# Altium PCB my-cnc.PcbDoc
Units mm, origin at the board's own origin, x right, y up, seen from the top; angles counter-clockwise.
Board outline 114.12 x 103.48 mm, 2 copper layers (Top Layer, Bottom Layer); 58 components, 59 nets, 304 pads, 76 vias.
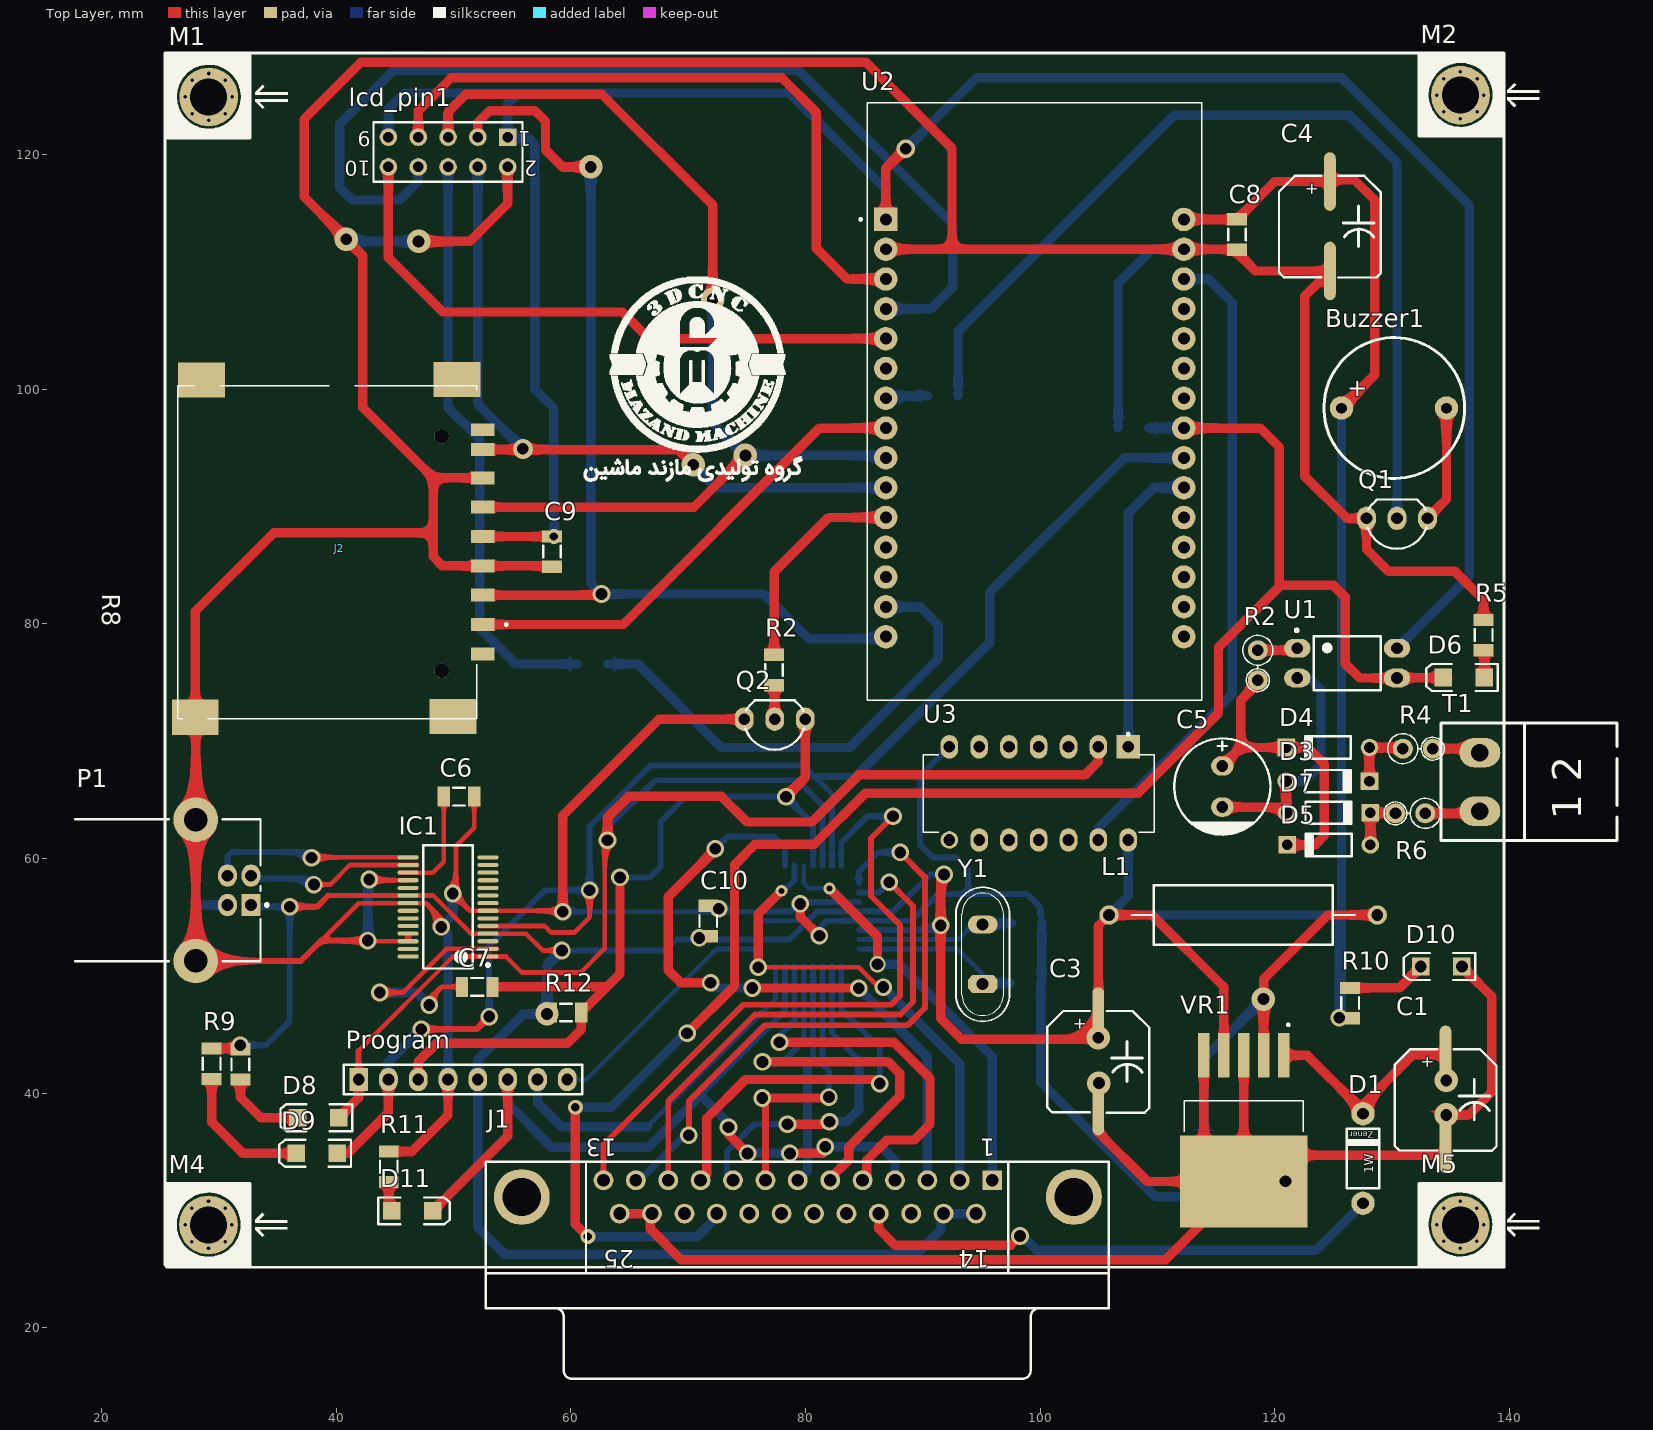
[diagram p0: Top Layer view]
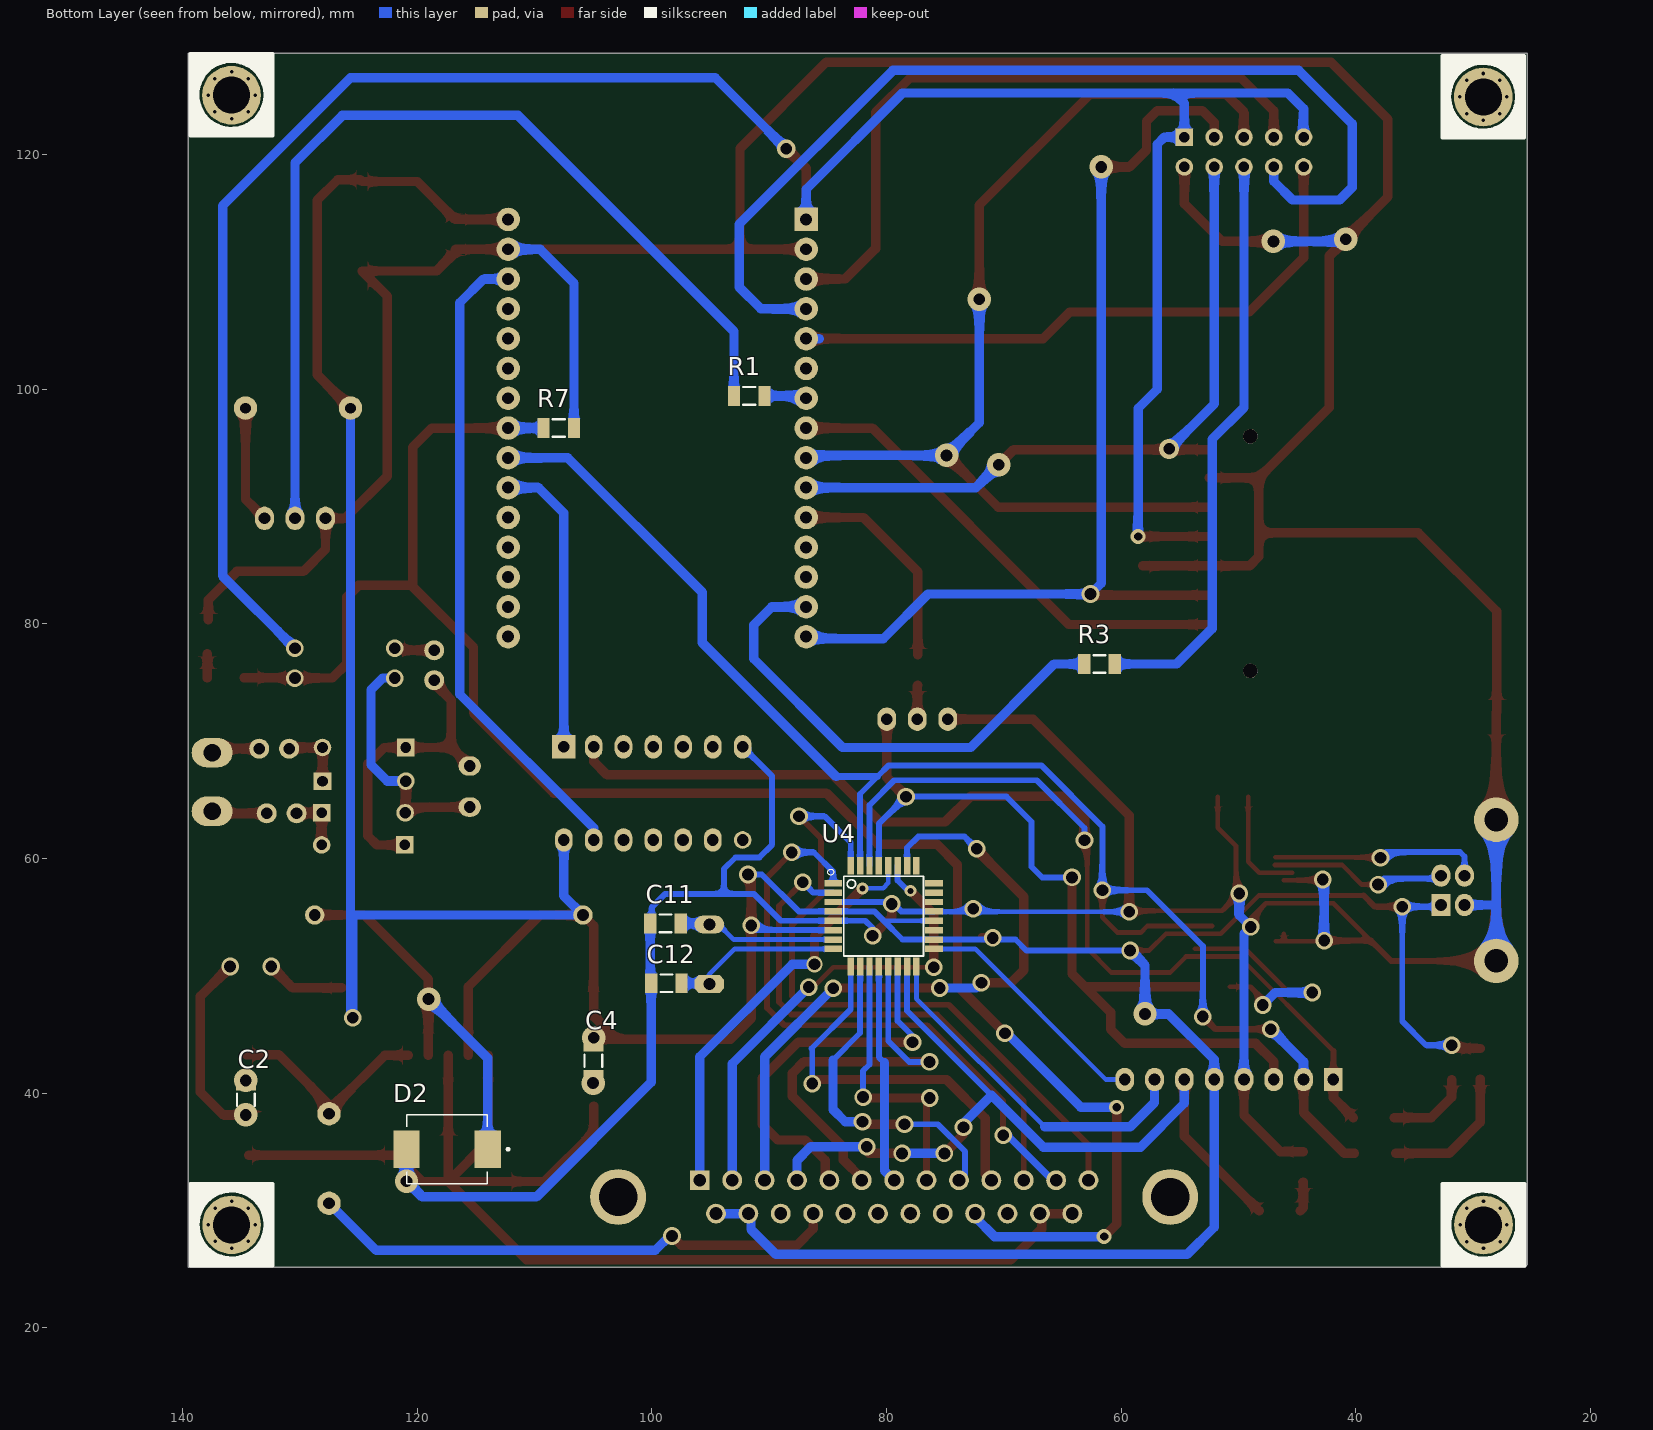
[diagram p1: Bottom Layer view, seen from below]
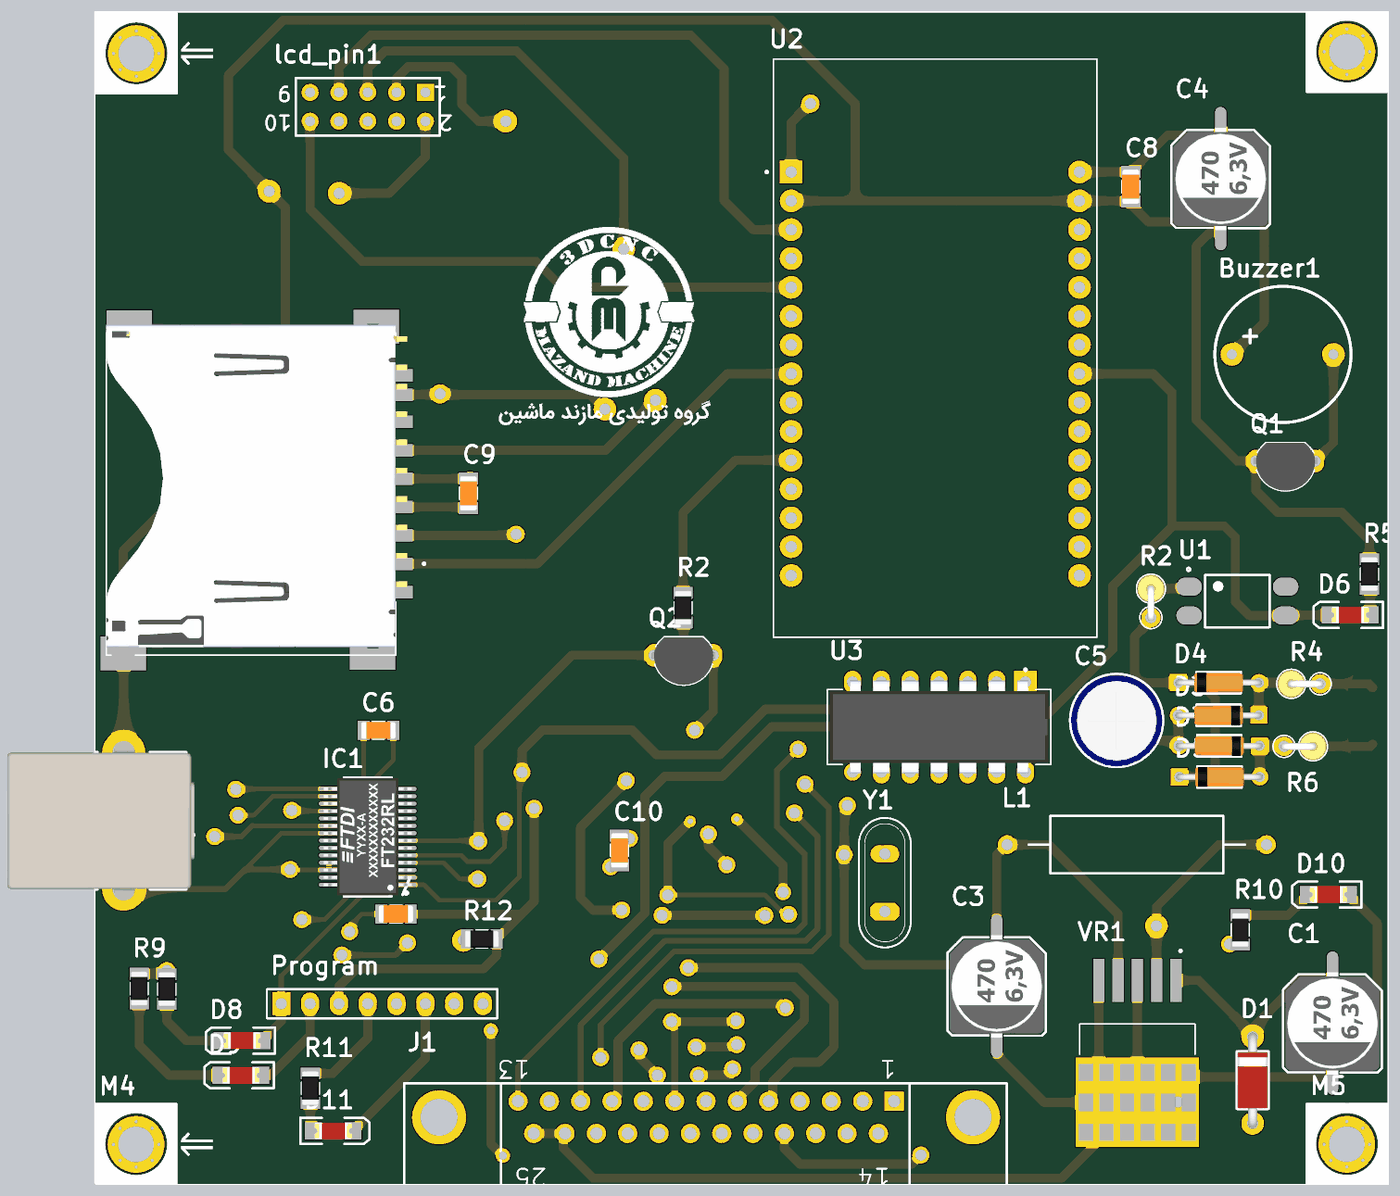
[diagram p2: 3D render of the assembled board from above, using the file's embedded part models]
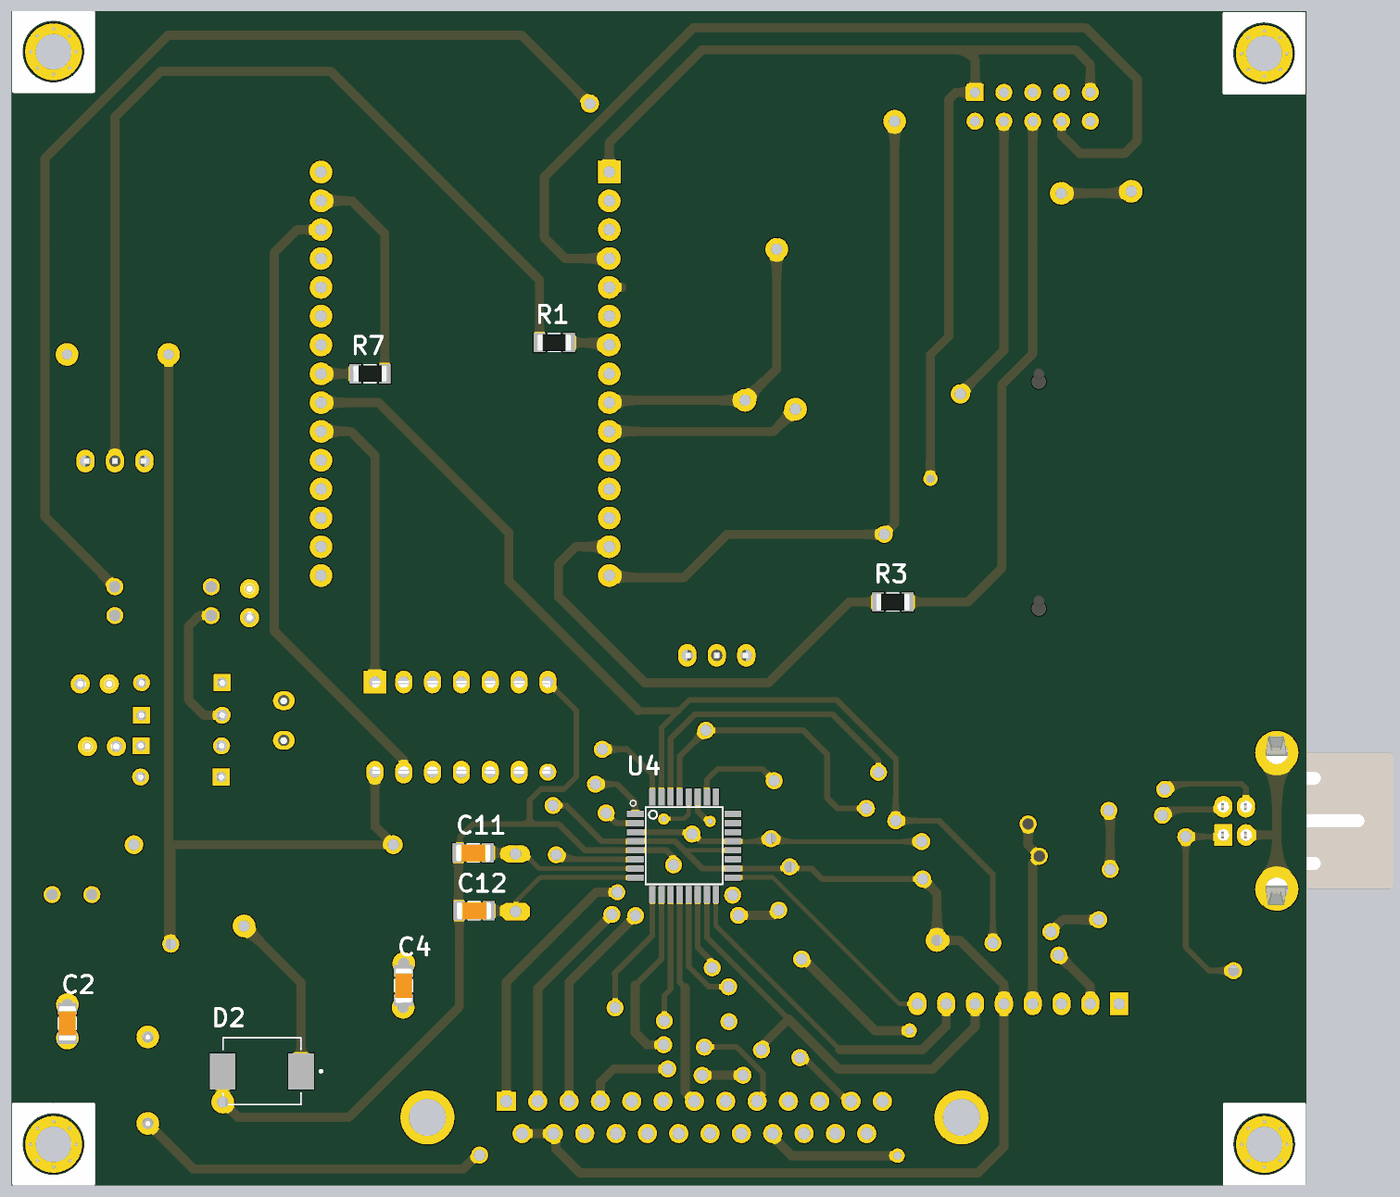
[diagram p3: 3D render of the assembled board from below, using the file's embedded part models]

## Layer stack, top to bottom
Top Solder: solder mask 0.0102, Solder Resist, Dk 3.5
Top Layer: signal copper 0.0356
Dielectric 1: dielectric 0.32, FR-4, Dk 4.8
Bottom Layer: signal copper 0.0356
Bottom Solder: solder mask 0.0102, Solder Resist, Dk 3.5

## Board outline
25.4,25.375 25.603,25.171 139.522,25.171 139.522,128.651 25.4,128.651

## Design rules (kind name [scope] priority, off if disabled: settings)
Clearance [All] p1: gap=0.2 ignorepadtopadclearanceinfootprint=FALSE
PolygonConnect [All] p1: connectstyle=Relief reliefconductorwidth=0.254 reliefentries=4 polygonreliefangle="90 Angle" airgapwidth=0.254
RoutingVias [All] p1: holewidth=0.711 width=1.27 viastyle="Through Hole" minholewidth=0.711 minwidth=1.27 maxholewidth=0.711 maxwidth=1.27
SolderMaskExpansion [All] p1: expansion=0.102
Width [All] p1: maxlimit=0.8 minlimit=0.4 preferedwidth=0.5
30 further rules are at their usual default settings.

## Components (designator, comment, footprint, x,y, rotation, side; value= is the part's Value field where it differs from the comment)
Buzzer1 "Buzzer" BUZZER 130.175,98.4 r0 top
C1 "1uF" "CAP SMD 470uF" 134.544,39.472 r90 top
C2 "100nF" SMD_CAP_1206 134.595,38.151 r90 bottom
C3 "1uF" "CAP SMD 470uF" 104.953,42.723 r90 top
C4 "1uF" "CAP SMD 470uF" 124.689,113.894 r90 top
C4 "100nF" SMD_CAP_1206 104.978,41.473 r90 bottom
C5 "1uF" "cap 03" 115.519,66.142 r90 top
C6 "100nF" SMD_CAP_1206 49.174,65.278 r0 top
C7 "100nF" SMD_CAP_1206 53.315,49.073 r180 top
C8 "100nF" SMD_CAP_1206 116.764,111.882 r90 top
C9 "100nF" SMD_CAP_1206 58.395,84.861 r90 top
C10 "100nF" SMD_CAP_1206 71.704,53.391 r90 top
C11 "100nF" SMD_CAP_1206 100.132,54.483 r180 bottom
C12 "100nF" SMD_CAP_1206 100.056,49.378 r180 bottom
D1 "Diode Zener" "Diode 1W" 127.508,34.442 r90 top
D2 "SS34" DIOM7959X265N 117.45,35.23 r0 bottom
D3 "1N4148" DO-35#1 124.511,66.599 r0 top
D4 "1N4148" DO-35#2 124.511,69.469 r180 top
D5 "1N4148" DO-35#2 124.587,61.163 r180 top
D6 "SMD 1206 LED" "LED 1206" 136.093,75.438 r180 top
D7 "1N4148" DO-35#1 124.562,63.906 r0 top
D8 "SMD 1206 LED" "LED 1206" 38.456,37.922 r180 top
D9 "SMD 1206 LED" "LED 1206" 38.354,34.874 r180 top
D10 "SMD 1206 LED" "LED 1206" 134.188,50.8 r180 top
D11 "SMD 1206 LED" "LED 1206" 46.482,29.972 r0 top
IC1 "FT232RL" SSOP-28_L 49.53,55.88 r180 top
J1 "D Connector 25" DSUB1.385-2H25A 79.341,21.663 r180 top
J2 "GSD090144HR" AMPHENOL_GSD090144HR 48.988,86.799 r270 top
L1 "Inductor Iron" AXIAL-0.9 117.297,55.194 r180 top value=10mH
lcd_pin1 "Header 5X2" HDR2X5 54.61,121.488 r180 top
M1 "Screw" "Board Screw" 29.134,124.911 r90 top
M2 "Screw" "Board Screw" 135.814,125.063 r90 top
M4 "Screw" "Board Screw" 29.115,28.778 r90 top
M5 "Screw" "Board Screw" 135.806,28.786 r90 top
P1 "USB Connector" USB2.5-2H4F 32.734,56.047 r180 top
Program "Header 8" HDR1X8 41.91,41.173 r0 top
Q1 "BC547" "TO-92 BENT" 130.404,89.002 r180 top
Q2 "BC547" "TO-92 BENT" 77.368,71.882 r180 top
R1 "1K" "RES 1206 (3216X08L)" 90.393,99.441 r0 bottom
R2 "1K" "Axial 0_25w_2_54mm" 118.542,76.479 r270 top
R2 "1K" "RES 1206 (3216X08L)" 77.318,77.368 r270 top
R3 "1K" "RES 1206 (3216X08L)" 60.554,76.581 r0 bottom
R4 "1K" "Axial 0_25w_2_54mm" 132.182,69.367 r0 top
R5 "1K" "RES 1206 (3216X08L)" 137.795,77.744 r90 top
R6 "1K" "Axial 0_25w_2_54mm" 131.547,63.856 r180 top
R7 "1K" "RES 1206 (3216X08L)" 106.629,96.698 r0 bottom
R8 "1K" "RES 1206 (3216X08L)" 31.826,43.764 r270 top
R9 "1K" "RES 1206 (3216X08L)" 29.388,43.815 r270 top
R10 "1K" "RES 1206 (3216X08L)" 126.416,46.38 r90 top
R11 "1K" "RES 1206 (3216X08L)" 44.475,35.032 r270 top
R12 "1K" "RES 1206 (3216X08L)" 58.288,46.888 r0 top
T1 "Phoenix terminal" "phoenix terminal 2" 149.149,61.54 r90 top
U1 "PC817X2NIP0F" SOT254P975X400-4N 126.162,76.657 r0 top
U2 "ESP32-DEVKIT-V1" MODULE_ESP32_DEVKIT_V1 99.543,98.958 r0 top
U3 "CD4066BE" DIP794W45P254L1969H508Q14 99.873,65.557 r270 top
U4 "ATMEGA328P-15AZ" QFP80P900X900X120-32N 80.245,55.1 r180 bottom
VR1 "LM2596S-5.0" TO170P1524X483-6N 117.348,36.83 r270 top
Y1 "6 MHz" My_Crystal 95.098,51.841 r90 top

## Footprints (in the part's own frame and the unit in brackets; to place one, negate y for a bottom-side part, rotate by r counter-clockwise, add the part's x,y. Pads: shape width x height; smd on the part's side, far side on the other; paste and mask are expansions set on the pad)
AMPHENOL_GSD090144HR [mm]
  rect 1.1x2 smd: 1(6.85,3.5) 2(4.35,3.5) 3(1.85,3.5) 4(-0.65,3.5) 5(-3.15,3.5) 6(-5.65,3.5) 7(-8.05,3.5) 8(-9.75,3.5) 9(9.35,3.5)
  rect 3x4 smd: G(14.75,-21) SA(-13.988,-20.463) SB(-14.039,1.304) SC(14.688,0.974)
  round 1.25 hole 1.25 unplated: ""(-9.2,0) ""(10.8,0)
  silkscreen extent -13.5,-22.5 14.9,5.6, body extent -14.3,-22.5 14.3,4, height 4.55
"Axial 0_25w_2_54mm" [mm] "Designer Abbas Basereh"
  round 1.7 hole 1: 1(1.275,0) 2(-1.275,0)
  silkscreen extent -2.55,-1.28 2.25,1.28, body extent -2.47,-1.2 1.57,1.2, height 9.4
AXIAL-0.9 [mm] "Axial Device, Thru-Hole; 2 Leads; 0.9 in Pin Spacing"
  round 1.65 hole 1: 1(-11.43,0) 2(11.43,0)
  silkscreen extent -9.53,-2.54 9.53,2.54
"Board Screw" [mm]
  round 0.6 hole 0.3: S(-2,0) S(-1.414,-1.414) S(-1.414,1.414) S(0,2) S(0,-2) S(1.414,-1.414) S(1.414,1.414) S(2,0)
  round 5 hole 3.15 mask+0.1: S(0,0)
  silkscreen extent -3.49,-6.75 3.56,3.52
BUZZER [mm] "BUZZER"
  round 2 hole 0.9: 1(-4.5,0) 2(4.45,0)
  silkscreen extent -6,-6 6,6
"cap 03" [mm]
  oval 1.651x1.905 hole 1: 1(1.75,0) 2(-1.75,0)
  silkscreen extent -4.1,-4.1 4.1,4.1, body extent -4.05,-4.04 4,4.01, height 12.03
"CAP SMD 470uF" [mm] "SMD CAP 470uF"
  oval 5x1 smd: 1(3.81,0) 2(-3.81,0)
  silkscreen extent -4.37,-4.34 4.29,4.34, body extent -4.53,-4.15 4.47,4.15, height 12
"Diode 1W" [mm]
  round 2 hole 1: 1(-3.81,0) 2(3.81,0)
  silkscreen extent -2.54,-1.4 2.54,1.4, body extent -4.22,-1.33 4.19,1.33, height 3.33
DIOM7959X265N [mm]
  rect 2.25x3.18 smd: A(3.455,0) C(-3.455,0)
  silkscreen extent -5.3,-2.95 3.44,2.95
DIP794W45P254L1969H508Q14 [mm]
  rect 2x2 / inner round 2 / far side rect 2x2 hole 1: 1(-3.97,7.62)
  oval 2x1.5 hole 1: 2(-3.97,5.08) 3(-3.97,2.54) 4(-3.97,0) 5(-3.97,-2.54) 6(-3.97,-5.08) 7(-3.97,-7.62) 9(3.97,-5.08) 10(3.97,-2.54) 11(3.97,0) 12(3.97,2.54) 13(3.97,5.08) 14(3.97,7.62)
  round 1.5 hole 1: 8(3.97,-7.62)
  silkscreen extent -5.15,-9.84 3.3,9.84, body extent -4.1,-9.65 4.1,9.65, height 5.08
DO-35#1 [mm] "Diode, Axial; Body 3.8 x 1.9 mm (LxDia. max), Lead Dia. 0.53 mm (max)"
  round 1.5 hole 1: 1(-3.55,0)
  rect 1.5x1.5 hole 0.9: 2(3.55,0)
  silkscreen extent -1.95,-0.95 2.05,0.95, body extent -3.82,-0.87 3.82,0.87, height 1.89
DO-35#2 [mm] "Diode, Axial; Body 3.8 x 1.9 mm (LxDia. max), Lead Dia. 0.53 mm (max)"
  round 1.5 hole 0.9: 1(-3.55,0)
  rect 1.5x1.5 hole 0.9: 2(3.55,0)
  silkscreen extent -1.95,-0.95 2.05,0.95, body extent -3.82,-0.87 3.82,0.87, height 1.89
DSUB1.385-2H25A [mm] "Connector; D Subminiature; 25 Position; Right Angle; Pitch 1.385 mm"
  rect 1.69x1.69 hole 1.09: 1(-16.566,-10.92)
  round 1.69 hole 1.09: 2(-13.805,-10.92) 3(-11.044,-10.92) 4(-8.283,-10.92) 5(-5.522,-10.92) 6(-2.761,-10.92) 7(0,-10.92) 8(2.761,-10.92) 9(5.522,-10.92) 10(8.283,-10.92) 11(11.044,-10.92) 12(13.805,-10.92) 13(16.566,-10.92) 14(-15.185,-8.08) 15(-12.424,-8.08) 16(-9.663,-8.08) 17(-6.902,-8.08) 18(-4.141,-8.08) 19(-1.38,-8.08) 20(1.381,-8.08) 21(4.142,-8.08) 22(6.903,-8.08) 23(9.664,-8.08) 24(12.425,-8.08) 25(15.186,-8.08)
  round 4.76 hole 3.26: 26(-23.526,-9.5) 27(23.526,-9.5)
  silkscreen extent -26.5,-12.5 26.6,6
HDR1X8 [mm] "Connector; Header; 8 Position"
  rect 1.6x2 hole 1: 1(0,0)
  oval 1.6x2 hole 1: 2(2.54,0) 3(5.08,0) 4(7.62,0) 5(10.16,0) 6(12.7,0) 7(15.24,0) 8(17.78,0)
  silkscreen extent -1.27,-1.27 19.05,1.27
HDR2X5 [mm] "Connector; Header; 5x2 Position"
  rect 1.5x1.5 hole 0.9: 1(0,0)
  round 1.5 hole 0.9: 2(0,2.54) 3(2.54,0) 4(2.54,2.54) 5(5.08,0) 6(5.08,2.54) 7(7.62,0) 8(7.62,2.54) 9(10.16,0) 10(10.16,2.54)
  silkscreen extent -1.27,-1.27 11.43,3.81
"LED 1206" [mm]
  rect 1.5x1.5 smd: 1(-1.75,0) 2(1.75,0)
  silkscreen extent -2.9,-1.15 3.2,1.15, body extent -1.65,-0.72 1.65,0.73, height 1.36
MODULE_ESP32_DEVKIT_V1 [mm]
  rect 2x2 / inner round 2 / far side rect 2x2 hole 1.02: 1(-12.7,15.515)
  round 2 hole 1.02: 2(-12.7,12.975) 3(-12.7,10.435) 4(-12.7,7.895) 5(-12.7,5.355) 6(-12.7,2.815) 7(-12.7,0.275) 8(-12.7,-2.265) 9(-12.7,-4.805) 10(-12.7,-7.345) 11(-12.7,-9.885) 12(-12.7,-12.425) 13(-12.7,-14.965) 14(-12.7,-17.505) 15(-12.7,-20.045) 16(12.7,-20.045) 17(12.7,-17.505) 18(12.7,-14.965) 19(12.7,-12.425) 20(12.7,-9.885) 21(12.7,-7.345) 22(12.7,-4.805) 23(12.7,-2.265) 24(12.7,0.275) 25(12.7,2.815) 26(12.7,5.355) 27(12.7,7.895) 28(12.7,10.435) 29(12.7,12.975) 30(12.7,15.515)
  silkscreen extent -14.95,-25.48 14.23,25.48
My_Crystal [mil]
  oct 60x100 hole 40: 1(-100,0)
  oval 60x100 hole 40: 2(100,0)
  silkscreen extent -225,-90 225,90
"phoenix terminal 2" [mm] "2 terminals"
  oval 2.5x3.5 hole 1.5: 1(2.493,11.684) 2(7.493,11.684)
  silkscreen extent 0,0 10.03,15
QFP80P900X900X120-32N [mm]
  rect 1.5x0.55 smd: 1(-4.3,2.8) 2(-4.3,2) 3(-4.3,1.2) 4(-4.3,0.4) 5(-4.3,-0.4) 6(-4.3,-1.2) 7(-4.3,-2) 8(-4.3,-2.8) 17(4.3,-2.8) 18(4.3,-2) 19(4.3,-1.2) 20(4.3,-0.4) 21(4.3,0.4) 22(4.3,1.2) 23(4.3,2) 24(4.3,2.8)
  rect 0.55x1.5 smd: 9(-2.8,-4.3) 10(-2,-4.3) 11(-1.2,-4.3) 12(-0.4,-4.3) 13(0.4,-4.3) 14(1.2,-4.3) 15(2,-4.3) 16(2.8,-4.3) 25(2.8,4.3) 26(2,4.3) 27(1.2,4.3) 28(0.4,4.3) 29(-0.4,4.3) 30(-1.2,4.3) 31(-2,4.3) 32(-2.8,4.3)
  silkscreen extent -4.75,-3.4 3.4,4
"RES 1206 (3216X08L)" [mm] "Chip Resistor, 2-Leads, Body 3.2x1.6mm, IPC High Density _ (0.125 W)"
  rect 1.05x1.7 smd: 1(0,0) 2(2.596,0)
  silkscreen extent 0.8,-0.75 1.8,0.75, body extent -0.23,-0.76 2.82,0.76, height 0.6
SMD_CAP_1206 [mm]
  rect 1.05x1.7 smd: 1(0,0) 2(2.596,0)
  silkscreen extent 0.8,-0.75 1.8,0.75, body extent -0.22,-0.77 2.82,0.75, height 0.75
SOT254P975X400-4N [mm]
  oval 2.25x1.6 smd: 1(-4.25,1.27) 2(-4.25,-1.27) 3(4.25,-1.27) 4(4.25,1.27)
  silkscreen extent -4.44,-2.3 2.85,2.94
SSOP-28_L [mm] "SOP, 28-Leads, Body 10.2x5.3mm, Pitch 0.65mm, IPC High Density"
  oval 1.8x0.35 smd: 1(-3.4,4.225) 2(-3.4,3.575) 3(-3.4,2.925) 4(-3.4,2.275) 5(-3.4,1.625) 6(-3.4,0.975) 7(-3.4,0.325) 8(-3.4,-0.325) 9(-3.4,-0.975) 10(-3.4,-1.625) 11(-3.4,-2.275) 12(-3.4,-2.925) 13(-3.4,-3.575) 14(-3.4,-4.225) 15(3.4,-4.225) 16(3.4,-3.575) 17(3.4,-2.925) 18(3.4,-2.275) 19(3.4,-1.625) 20(3.4,-0.975) 21(3.4,-0.325) 22(3.4,0.325) 23(3.4,0.975) 24(3.4,1.625) 25(3.4,2.275) 26(3.4,2.925) 27(3.4,3.575) 28(3.4,4.225)
  silkscreen extent -3.52,-5.25 2.1,5.25, body extent -3.88,-5.17 3.88,5.17, height 2.16
TO170P1524X483-6N [mm]
  rect 3.79x0.99 smd: 1(-6.4,3.4) 2(-6.4,1.7) 3(-6.4,0) 4(-6.4,-1.7) 5(-6.4,-3.4)
  rect 7.88x10.84 smd paste-6: 6(4.35,0)
  silkscreen extent -9.1,-5.08 0.09,5.08
"TO-92 BENT" [mm] "DESIGNER :ABBAS BASEREH"
  oval 1.6x2 hole 1: 1(-2.6,0) 2(0,0) 3(2.6,0)
  silkscreen extent -2.51,-1.6 2.51,2.6, body extent -2.79,-1.59 2.79,2.61, height 10
USB2.5-2H4F [mm] "Connector; USB1.1, Type B, Thru-Hole; 4 Position; Right Angle"
  rect 1.6x1.9 hole 1: 1(0,0)
  oval 1.6x1.9 hole 1: 2(0,-2.5) 3(2,-2.5) 4(2,0)
  round 3.8 hole 2: 4(4.71,4.77) 4(4.71,-7.27)
  silkscreen extent -1.48,-7.3 14.99,4.8, body extent -1.5,-8.7 15,6.2, height 10.95

## Part data
C1 C3 C4: library part "Cap ELECTROLITIC TOTAL SIZE", "Cap electrolitic radial", Data=16-12-2016, Designer="Abbas Basereh"
C2 C4 C6 C7 C8 C9 C10 C11 C12: library part Cap-Bipolar, "Bipolar Capacitor", Voltage=100V, Adding Date=1387/12/20, Designer="Saeid Jorablo", Organazation=ControTec
C5: library part Cap-Polar, "Polar Capacitor", Voltage=16V, Adding Date=1387/12/20, Designer="Saeid Jorablo", Organazation=ControTec
D1: "Zener Diode", Voltage="3.3 V", Company=E.P.I.L, Design Date=2011/11/02, Designer="Saeid Jorablo"
D2: "Diode Schottky 40 V 3A Surface Mount SMC (DO-214AB)", Package="SMC-2 ON Semiconductor", Availability="In Stock", Check_prices=https://www.snapeda.com/parts/SS34/Onsemi/view-part/?ref=eda, MF="ON Semiconductor", MP=SS34, Price=None, SnapEDA_Link=https://www.snapeda.com/parts/SS34/Onsemi/view-part/?ref=snap
D3 D4 D5 D7: library part "Diode 1N4148", "High Conductance Fast Diode", Code_JEDEC=DO-204-AH, ComponentLink1Description="Manufacturer Link", ComponentLink1URL=http://www.fairchildsemi.com/, ComponentLink2Description=Datasheet, ComponentLink2URL=http://www.fairchildsemi.com/ds/1N%2F1N4148.pdf, DatasheetVersion=1997, LatestRevisionDate=17-Jul-2002, LatestRevisionNote="Re-released for DXP Platform.", PackageDescription="Diode, Axial; Body 3.8 x 1.9 mm (LxDia. max), Lead Dia. 0.53 mm (max)", PackageReference=DO-35, Published=8-Jun-2000, Publisher="Altium Limited"
D6 D8 D9 D10 D11: library part "LED SMD 1206"
IC1: "USB UART Asynchronous Serial Data Transfer Chip, SSOP-28, Tape and Reel", ComponentLink1Description="Manufacturer Link", ComponentLink1URL=http://www.ftdichip.com/Products/ICs/FT232R.htm, ComponentLink2Description=Datasheet, ComponentLink2URL=http://www.ftdichip.com/Support/Documents/DataSheets/ICs/DS_FT232R.pdf, DatasheetVersion="ver 2.07, Jul-2010", PackageDescription="28-Pin Small Outline Package 0.65 mm Pitch", PackageReference=SSOP-28, PackageVersion=2010, Published=19-Aug-2010, Publisher="Altium Limited"
J1: "Receptacle Assembly, 25 Position, Right Angle", PackageDocument=U, DatasheetDocument=19-Mar-1999, Gender=Receptacle, LatestRevisionDate=17-Jul-2002, LatestRevisionNote="Re-released for DXP Platform.", Orientation="Right Angle", PackageReference=787202, Positions=25, Published=15-Jun-2001, Publisher="Altium Limited"
J2: "Sd Card Connector, Push-push Type, 9 Position.", Package=None, Availability="In Stock", Check_prices=https://www.snapeda.com/parts/GSD090144HR/Amphenol/view-part/?ref=eda, MF="Amphenol ICC (Commercial Products)", MP=GSD090144HR, Price=None, Purchase-URL=https://pricing.snapeda.com/search/part/GSD090144HR/?ref=eda, SnapEDA_Link=https://www.snapeda.com/parts/GSD090144HR/Amphenol/view-part/?ref=snap
L1: "Magnetic-Core Inductor", LatestRevisionDate=17-Jul-2002, LatestRevisionNote="Re-released for DXP Platform.", PackageDescription="Axial Device, Thru-Hole; 2 Leads; 0.9 in Pin Spacing", PackageReference=AXIAL-0.9, Published=24-Mar-1999, Publisher="Altium Limited"
lcd_pin1: "Header, 5-Pin, Dual row", LatestRevisionDate=17-Jul-2002, LatestRevisionNote="Re-released for DXP Platform.", Publisher="Altium Limited"
M1 M2 M4 M5: library part "Board Screw", "Board Screw With Spacer"
P1: library part "USB B-Type", "USB Connector-B Type", Adding Date=10/26/2010
Program: "Header, 8-Pin", LatestRevisionDate=17-Jul-2002, LatestRevisionNote="Re-released for DXP Platform.", Publisher="Altium Limited"
Q1 Q2: "NPN General-purpose Transistor", Data=27-12-2016, Desc.="Plastic Medium-Power. Silicon NPN Transistors", Designer="Abbas Basereh"
R1 R2 R3 R5 R7 R8 R9 R10 R11 R12: library part Resistor, "Resistor", Power="1/8 W", Tolerance=5%
R2 R4 R6: library part "RES Axial 0.25W", "RES Axial 0.25W", Data=4-1-2017, Desc.="RES Axial 0.25W", Designer="Abbas Basereh"
T1: library part "Phoenix terminal 2", "Terminal 2 Pin", ComponentLinkURL=www.picpars.com, Designer="Seyed Mohsen Ghasemain", E-mail=picpars@gmail.com
U1: "Optoisolator Transistor Output 5000Vrms 1 Channel 4-SMD", Package="SMD-4 Sharp", Availability=Unavailable, MF="Sharp Microelectronics", MP=PC817X2NIP0F, Price=None, SnapEDA_Link=https://www.snapeda.com/parts/PC817X2NIP0F/Sharp%20Microelectronics/view-part/2874099/?ref=snap
U2: "Dual core, Wi-Fi: 2.4 GHz up to 150 Mbits/s,BLE (Bluetooth Low Energy) and legacy Bluetooth, 32 bits, Up to 240 MHz", Package=None, Availability="Not in stock", Check_prices=https://www.snapeda.com/parts/ESP32-DEVKIT-V1/Do+it/view-part/?ref=eda, MF="Do it", MP=ESP32-DEVKIT-V1, Price=None, SnapEDA_Link=https://www.snapeda.com/parts/ESP32-DEVKIT-V1/Do+it/view-part/?ref=snap
U3: "10-pA on-state leakage current, 20-V, 1:1 (SPST), 4-channel analog switch", Package="PDIP-14 Texas Instruments", Availability="In Stock", Check_prices=https://www.snapeda.com/parts/CD4066BE/Texas+Instruments/view-part/?ref=eda, MF="Texas Instruments", MP=CD4066BE, Price=None, Purchase-URL=https://pricing.snapeda.com/search/part/CD4066BE/?ref=eda, SnapEDA_Link=https://www.snapeda.com/parts/CD4066BE/Texas+Instruments/view-part/?ref=snap
U4: "AVR Automotive, AEC-Q100, AVR® ATmega Microcontroller IC 8-Bit 16MHz 32KB _16K x 16_ FLASH 32-TQFP _7x7_", Package="TQFP-32 Microchip", Digi-Key_Part_Number=ATMEGA328P-15AZCT-ND, Digi-Key_Purchase_URL=https://www.digikey.com/product-detail/en/microchip-technology/ATMEGA328P-15AZ/ATMEGA328P-15AZCT-ND/2477177?utm_source=snapeda&utm_medium=aggregator&utm_campaign=symbol, MF=Microchip, MP=ATMEGA328P-15AZ, SnapEDA_Link=https://www.snapeda.com/parts/ATMEGA328P-15AZ/Microchip/view-part/1227234/?ref=snap
VR1: Package=None, Availability=Unavailable, MP=LM2596S-5.0, Price=None
Y1: library part CRYSTAL, "Crystal"
Buzzer1: ComponentLinkURL=www.picpars.com, Designer="Seyed Mohsen Ghasemain"

## Via types
v1: diameter 1.5, hole 1, Top Layer to Bottom Layer, 55 vias
v2: diameter 2, hole 1, Top Layer to Bottom Layer, 13 vias
v3: diameter 1.27, hole 0.711, Top Layer to Bottom Layer, 3 vias
v4: diameter 1, hole 0.5, Top Layer to Bottom Layer, 2 vias
v5: diameter 1.6, hole 1, Top Layer to Bottom Layer, 1 vias
v6: diameter 1.7, hole 1, Top Layer to Bottom Layer, 1 vias
v7: diameter 1.4, hole 1, Top Layer to Bottom Layer, 1 vias

## Nets (pads, with @x,y where several pads share a name; then routed paths per layer and width w, separated by ;. In a path a pad name is that pad's centre, name@x,y a point inside that pad or via, vN(x,y) a via of type N, cw(c..) or ccw(c..) an arc to the next point about the centre after c; other vN are vias at no path point)
3.3v: C9.2 J2.4 lcd_pin1.1 lcd_pin1.9 U1.4 U2.1 | length 200.2
  Top Layer w0.8: J2.4 v3(58.544,87.449) ; U2.1 86.843,118.821 88.519,120.498 v5(88.544,120.498)
  Bottom Layer w0.8: lcd_pin1.9 44.45,123.901 45.796,125.247 55.499,125.247 ; v3(58.544,87.449) 58.544,98.377 56.921,100 56.921,120.879 56.312,121.488 lcd_pin1.1 54.61,124.358 55.499,125.247 ; U2.1 86.843,117.043 78.638,125.247 55.499,125.247 ; v5(88.544,120.498) 94.59,126.543 125.679,126.543 136.576,115.646 136.576,84.091 v1(130.412,77.927)
abort: J1.1 U4.28 | length 35.6
  Top Layer w0.8: v4(82.042,57.455) 86.131,53.365 v7(86.131,51.003)
  Bottom Layer w0.4: U4.28 79.845,57.925 80.289,57.48 82.017,57.48 v4(82.042,57.455)
  Bottom Layer w0.8: v7(86.131,51.003) 88.011,51.003 95.907,43.108 J1.1
buzzer: R1.1 U2.7 | length 3.9
  Top Layer w0.8: U2.7@86.66,99.416 U2.7
  Bottom Layer w0.8: U2.7 87.05,99.441 R1.1
d5: J2.1 U2.8 | length 41.3
  Top Layer w0.5: U2.8@86.411,96.693 U2.8
  Top Layer w0.8: J2.1 64.455,79.949 81.199,96.693 U2.8@86.411,96.693
d13: U2.28 U3.13 | length 55.5
  Bottom Layer w0.8: U3.13 104.953,62.611 116.357,74.016 116.357,107.366 114.33,109.393 U2.28
d25: D6.2 J1.22 R7.2 U1.3 U2.23 | length 155.7
  Top Layer w0.8: v3(60.376,38.811) 60.376,28.854 v3(61.443,27.788) ; v1(69.901,45.11) 73.943,49.153 73.943,59.465 75.692,61.214 80.747,61.214 85.115,65.583 108.356,65.583 115.189,72.415 115.189,78.003 120.383,83.198 ; U2.23 118.749,96.693 120.383,95.059 120.383,83.287 124.993,83.287 125.984,82.296 125.984,76.632 127.229,75.387 v1(130.412,75.387) 130.437,75.413 D6.2@134.75,75.413
  Bottom Layer w0.8: v3(60.376,38.811) 63.424,38.811 69.723,45.11 v1(69.901,45.11) ; v3(61.443,27.788) 70.79,27.788 72.438,29.436 J1.22 ; R7.2 112.238,96.698 U2.23
dir_x: J1.10 U4.9 | length 33.1
  Top Layer w0.8: J1.10 71.577,33.103 71.577,37.871 74.879,41.173 85.979,41.173 v1(86.328,40.825)
  Bottom Layer w0.5: U4.9 83.045,47.155 86.385,43.815 86.328,43.757 v1(86.328,40.825)
dir_y: J1.9 U4.10 | length 28.6
  Top Layer w0.8: v1(78.461,37.363) 81.839,37.363 v1(82.042,37.567)
  Bottom Layer w0.5: J1.9 73.304,33.098 73.304,35.052 75.616,37.363 v1(78.461,37.363) ; U4.10 82.245,45.136 84.557,42.824
  Bottom Layer w0.8: v1(82.042,37.567) 83.515,37.567 84.557,38.608 84.557,42.824
dir_z: J1.8 U4.11 | length 24.5
  Top Layer w0.4: J1.8@76.352,32.811 J1.8
  Top Layer w0.5: v1(76.302,39.599) v1@76.58,39.321
  Top Layer w0.6: J1.8 v1@76.58,39.321
  Top Layer w0.8: v1(76.302,39.599) 81.915,39.599 v1(81.991,39.675)
  Bottom Layer w0.5: U4.11 81.445,42.455 81.991,41.909 v1(81.991,39.675)
enable: J1.7 U4.12 | length 18.8
  Bottom Layer w0.4: J1.7@79.331,32.583 J1.7@79.336,32.588
  Bottom Layer w0.5: 80.162,42.596 80.645,43.078 U4.12
  Bottom Layer w0.8: J1.7 80.162,33.405 80.162,42.596
end_x: J1.6 U4.13 | length 34.3
  Top Layer w0.8: v1(76.327,42.672) 76.352,42.697 87.02,42.697 88.011,41.707 88.011,39.751 83.668,35.408 83.668,34.315 82.102,32.75 J1.6
  Bottom Layer w0.5: v1(76.327,42.672) 78.054,42.672 79.845,44.463 U4.13
end_y: J1.5 U4.14 | length 34.1
  Top Layer w0.8: v1(77.775,44.348) 87.528,44.348 90.602,41.275 90.602,37.363 89.256,36.017 86.944,36.017 85.217,34.29 85.217,32.938 J1.5
  Bottom Layer w0.5: v1(77.775,44.348) 77.445,44.348 77.343,44.45 79.045,46.152 U4.14
end_z: D11.2 J1.4 Program.6 U4.15 | length 71.4
  Top Layer w0.8: D11.2 54.61,36.35 Program.6 ; v1(73.431,37.109) 73.431,36.5 v1(75.057,34.874) ; v1(78.664,34.874) 81.458,34.874 v1@81.483,34.9
  Bottom Layer w0.4: v1(73.431,37.109) 73.754,37.109 73.762,37.117 v1@73.6,37.278
  Bottom Layer w0.5: 71.048,39.831 78.245,47.028 U4.15
  Bottom Layer w0.8: Program.6 54.61,39.141 58.344,35.408 66.624,35.408 71.048,39.831 73.431,37.447 v1(73.431,37.109) ; v1(75.057,34.874) v1(78.664,34.874) ; v1(81.686,35.433) 86.462,35.433 87.624,34.271 J1.4
GND: C1.2 C2.1 C3.2 C4.1@104.978,41.473 C4.2@124.689,110.084 C6.2 C8.1 C9.1 C10.2 C11.1 C12.1 D2.A D10.1 IC1.7 IC1.18 IC1.21 IC1.25 IC1.26 J1.24 J1.25 J2.3 J2.6 J2.G lcd_pin1.2 P1.4 Program.4 Q1.3 Q2.3 R5.2 R7.1 R11.1 U2.2 U2.29 U3.7 U4.3 U4.5 U4.21 VR1.3 VR1.5 VR1.6 | length 666.8
  Top Layer w0.3: v1@59.228,55.555 v1(59.309,55.474)
  Top Layer w0.4: 38.71,53.01 41.905,56.205 IC1.21 47.656,56.205 48.946,54.915 v1(48.946,54.178) ; v1(42.824,58.217) 42.886,58.155 IC1.18 ; v1@42.951,52.955 43.746,52.955 46.812,52.959 IC1.26 IC1.25 ; C6.2 51.77,62.642 50.216,61.087 50.216,57.302 v1(49.936,57.023) 51.404,55.555 IC1.7 v1@59.228,55.555
  Top Layer w0.5: P1.4@28.024,51.277 36.977,51.277 38.71,53.01 v1(42.697,53.01)
  Top Layer w0.8: P1.4@28.024,51.277 28.024,63.317 28.024,72.455 27.988,72.492 27.988,81.074 34.671,87.757 48.267,87.757 ; R11.1 46.436,35.032 49.53,38.125 Program.4 ; v2(47.015,112.598) 51.384,112.598 54.61,115.824 lcd_pin1.2 ; J2.6 48.267,92.449 ; C9.1@58.149,84.949 J2.3 49.061,84.949 48.267,85.743 48.267,87.757 ; v1(59.309,55.474) 59.309,63.678 67.513,71.882 Q2.3 ; J1.25 J1.24 66.777,29.604 66.777,28.423 69.393,25.806 110.674,25.806 VR1.6 ; v1(79.553,56.136) 79.553,55.04 v1(81.178,53.414) ; U2.2 92.481,111.933 ; C3.2 104.953,36.678 109.15,32.48 VR1.6 ; VR1.5 113.948,35.88 VR1.6 ; VR1.3 VR1.6 ; C1.2@134.341,34.722 121.818,34.722 119.577,32.48 VR1.6 ; v2(134.595,38.151) 136.525,38.151 138.481,40.107 138.481,48.257 v1(135.938,50.8) ; R5.2 137.795,82.042 135.357,84.48 129.692,84.48 127.804,86.369 Q1.3 126.136,89.002 122.53,92.608 122.53,107.925 124.689,110.084 118.339,110.084 116.764,111.658 C8.1 116.712,111.933 U2.29 92.481,111.933 ; 48.267,87.757 48.267,92.449 ; 48.267,92.449 42.266,98.45 42.266,111.354 v2(40.843,112.776) 40.843,112.827 37.262,116.408 37.262,123.012 42.113,127.864 85.141,127.864 92.481,120.523 92.481,111.933
  Bottom Layer w0.3: C11.1 C11.1@100.132,54.991
  Bottom Layer w0.4: v1(59.309,55.474) 75.919,55.474 U4.21
  Bottom Layer w0.5: U4.21 78.741,55.5 79.377,56.136 v1(79.553,56.136) 79.717,56.3 U4.3 ; v1(81.178,53.414) 81.178,54.079 81.8,54.7 U4.5 89.015,54.7 91.313,56.998 93.853,56.998 ; U3.7 89.738,67.013 89.738,61.189 90.83,60.096 92.862,60.096 93.853,59.106 93.853,56.998 ; C11.1@100.132,54.991 100,55.123 100,55.855 98.857,56.998 93.853,56.998 ; C4.1@104.978,41.473 104.978,40.894 v2(105.004,40.869)
  Bottom Layer w0.8: P1.4@28.024,51.277 28.024,56.032 ; P1.4@28.024,63.317 28.024,56.032 ; P1.4@30.734,56.047 28.039,56.047 28.024,56.032 ; v2(40.843,112.776) 41.021,112.598 v2(47.015,112.598) ; v1(42.697,53.01) 42.697,58.09 v1(42.824,58.217) ; Program.4 49.53,53.594 v1(48.946,54.178) 49.936,55.169 v1(49.936,57.023) ; C11.1 100.132,49.454 C12.1 100.056,40.94 109.83,31.166 119.558,31.166 v2(120.904,32.512) D2.A ; R7.1 106.629,109.042 109.52,111.933 U2.29
  other v1: 72.593,55.728
hold: J1.2 U4.27 | length 40.6
  Top Layer w0.4: v1(75.971,50.749) 84.531,50.749 86.233,49.047 v1(86.614,49.047)
  Top Layer w0.8: v1(75.971,50.749) 75.971,55.27 v4(77.953,57.252)
  Bottom Layer w0.5: v4(77.953,57.252) 78.156,57.252 79.045,58.141 U4.27
  Bottom Layer w0.8: v1(86.614,49.047) 93.146,42.516 J1.2
lcd_cs: lcd_pin1.7 U2.3 | length 57.2
  Top Layer w0.8: lcd_pin1.7 46.99,123.723 49.809,126.543 77.978,126.543 80.924,123.596 80.924,111.989 83.52,109.393 U2.3
lcd_miso: J2.7 lcd_pin1.4 U2.10 | length 61.3
  Top Layer w0.8: J2.7 56.312,94.849 69.159,94.849 v2(70.434,93.574)
  Bottom Layer w0.8: lcd_pin1.4 52.07,98.755 v6(55.905,94.92) ; v2(70.434,93.574) 72.394,91.613 U2.10
lcd_mosi: J2.2 lcd_pin1.3 U2.15 | length 87.6
  Top Layer w0.5: v1@62.51,82.449 v1(62.611,82.55)
  Top Layer w0.8: lcd_pin1.3 52.07,122.733 53.086,123.749 56.921,123.749 57.836,122.834 57.836,120.396 59.284,118.948 v2(61.697,118.948) ; J2.2 v1@62.51,82.449
  Bottom Layer w0.8: v2(61.697,118.948) 61.697,83.464 v1(62.611,82.55) 76.454,82.55 80.264,78.74 U2.15@86.97,78.74
lcd_reset: R3.2 U2.14 | length 42.2
  Bottom Layer w0.8: R3.2 65.71,76.581 72.822,69.469 83.744,69.469 91.313,77.038 91.313,79.908 89.768,81.453 U2.14
lcd_rs: lcd_pin1.8 U2.4 | length 86.6
  Top Layer w0.5: U2.4@86.136,106.853 U2.4
  Bottom Layer w0.8: lcd_pin1.8 46.99,117.729 45.39,116.129 41.377,116.129 40.31,117.196 40.31,122.631 44.856,127.178 79.451,127.178 92.558,114.071 92.558,108.712 90.699,106.853 U2.4
lcd_sck: J2.5 lcd_pin1.5 U2.9 | length 88
  Top Layer w0.8: lcd_pin1.5 49.53,123.622 51.054,125.146 62.636,125.146 72.085,115.697 v2(72.085,107.671) ; J2.5 70.467,89.949 v2(74.879,94.361)
  Bottom Layer w0.8: v2(72.085,107.671) 72.085,97.155 v2(74.879,94.361) 86.635,94.361 U2.9
miso_m328: Program.7 U4.16 | length 30.4
  Bottom Layer w0.4: 66.523,37.135 77.445,48.057 U4.16
  Bottom Layer w0.8: Program.7 57.15,39.218 59.233,37.135 66.523,37.135
NetBuzzer1_2: Buzzer1.2 Q1.1 | length 10.1
  Top Layer w0.8: Q1.1 134.625,90.623 Buzzer1.2
NetC1_1: C1.1 C2.2 D1.2 VR1.1 | length 18.4
  Top Layer w0.8: VR1.1 122.759,43.23 126.975,39.014 D1.2@126.975,38.456 ; D1.2 127.508,39.014 131.775,43.282 C1.1
  Bottom Layer w0.8: C2.2 v2(134.595,41.097)
NetC5_1: C5.1 D4.2 D5.2 R2.1@118.542,75.204 | length 25.9
  Top Layer w0.8: C5.1 117.097,69.469 ; R2.1@118.77,75.184 117.097,73.51 117.097,69.469 ; D5.2 123.419,61.163 124.206,61.951 124.206,68.072 122.809,69.469 D4.2 117.097,69.469
NetC5_2: C5.2 D3.1 D7.1 U1.2 | length 20.6
  Top Layer w0.8: C5.2 120.526,64.392 120.961,63.957 D3.1
  Bottom Layer w0.8: D3.1 122.53,66.599 123.927,67.996 123.927,74.397 122.936,75.387 v1(121.912,75.387)
NetC6_1: C6.1 IC1.17 | length 9.7
  Top Layer w0.4: IC1.17@45.415,58.805 48.239,58.805 49.174,59.741 C6.1
NetC7_2: C7.2 IC1.2 | length 19.9
  Top Layer w0.4: v1(43.713,48.59) 45.72,48.59 49.435,52.305 IC1.2@53.696,52.305 ; v1(47.93,47.523) 47.93,48.031 48.971,49.073 C7.2
  Bottom Layer w0.8: v1(43.713,48.59) 46.863,48.59 v1(47.93,47.523)
NetC11_2: C11.2 U4.7 Y1.2 | length 13.6
  Bottom Layer w0.4: U4.7 93.003,53.1 94.285,54.381 Y1.2
  Bottom Layer w0.8: Y1.2 95.199,54.483 C11.2
NetC12_2: C12.2 U4.8 Y1.1 | length 14.7
  Bottom Layer w0.4: U4.8 92.937,52.3 95.098,50.14 Y1.1
  Bottom Layer w0.8: Y1.1 95.174,49.378 C12.2
NetD2_C: D2.C L1.1 VR1.2 | length 33.3
  Top Layer w0.8: VR1.2 119.048,49.731 124.511,55.194 L1.1
  Bottom Layer w0.8: D2.C 113.995,43.002 v2(119.024,48.031)
NetD3_2: D3.2 D4.1 R4.2 | length 5.8
  Top Layer w0.8: D3.2 D4.1 130.805,69.469 R4.2
NetD5_1: D5.1 D7.2 R6.1 | length 4.9
  Top Layer w0.8: D5.1 128.137,63.881 D7.2 130.221,63.906 R6.1
NetD6_1: D6.1 R5.1 | length 2.1
  Top Layer w0.8: D6.1@137.869,75.387 R5.1@137.869,77.462
NetD8_2: D8.2 R8.2 | length 7.1
  Top Layer w0.8: R8.2 31.826,39.675 33.579,37.922 D8.2
NetD9_2: D9.2 R9.2 | length 12
  Top Layer w0.8: R9.2 29.388,37.541 32.055,34.874 D9.2
NetD10_2: D10.2 R10.2 | length 6.8
  Top Layer w0.8: R10.2 130.615,48.976 v1(132.438,50.8)
NetD11_1: D11.1 R11.2 | length 2.6
  Top Layer w0.4: R11.2@44.732,32.436 R11.2@44.732,32.461
  Top Layer w0.8: R11.2 44.475,30.229 D11.1
NetIC1_15: IC1.15 P1.3 | length 18.6
  Top Layer w0.3: P1.3 P1.3@30.734,59.08
  Top Layer w0.4: v1(37.897,60.071) 37.931,60.105 IC1.15@46.838,60.105
  Bottom Layer w0.4: v1@37.414,60.554 v1(37.897,60.071)
  Bottom Layer w0.5: P1.3 30.734,60.173 31.115,60.554 v1@37.414,60.554
NetIC1_16: IC1.16 P1.2 | length 15.2
  Top Layer w0.4: v1(38.1,57.785) 39.472,57.785 41.142,59.455 IC1.16@46.888,59.455
  Bottom Layer w0.4: P1.2 P1.2@32.988,58.293 ; v1@37.592,58.293 v1(38.1,57.785)
  Bottom Layer w0.5: P1.2@32.988,58.293 v1@37.592,58.293
Netlcd_pin1_6: lcd_pin1.6 R3.1 | length 50
  Bottom Layer w0.8: lcd_pin1.6 49.53,98.45 52.248,95.733 52.248,79.604 55.27,76.581 R3.1
NetQ1_2: Q1.2 R1.2 | length 82.5
  Bottom Layer w0.8: R1.2 92.989,104.927 111.404,123.342 126.365,123.342 130.404,119.304 Q1.2
NetQ2_2: Q2.2 R2.2@77.318,74.772 | length 2.9
  Top Layer w0.8: R2.2@77.318,74.772 77.368,74.722 Q2.2
NetR2_2: R2.2@118.542,77.754 U1.1 | length 3.4
  Top Layer w0.8: R2.2@118.542,77.754 121.739,77.754 v1(121.912,77.927)
NetR4_1: R4.1 T1.2 | length 4.8
  Top Layer w0.8: R4.1 137.74,69.367 T1.2@138.074,69.033
NetR6_2: R6.2 T1.1 | length 5.3
  Top Layer w0.8: R6.2 137.897,63.856 T1.1@138.074,64.033
reset: R2.1@77.318,77.368 U2.11 | length 18.5
  Top Layer w0.8: R2.1@77.318,77.368 77.318,84.43 81.961,89.073 U2.11
reset_m328: C7.1 Program.3 Q2.1 R12.2 U4.29 | length 74
  Top Layer w0.8: Program.3 46.99,42.697 48.539,44.247 59.69,44.247 60.884,45.441 R12.2 63.068,49.073 ; C7.1 63.068,49.073 ; v1(64.186,58.395) 64.186,50.19 63.068,49.073 ; v1(78.334,65.278) 79.968,66.913 Q2.1
  Bottom Layer w0.5: v1(64.186,58.395) 66.726,58.395 67.64,59.309 67.64,63.144 69.774,65.278 v1(78.334,65.278) 80.645,62.967 U4.29
resume: J1.3 U4.26 | length 57.2
  Top Layer w0.8: v1(71.907,49.428) 69.367,49.428 68.287,50.509 68.287,56.73 v1@72.288,60.731 ; v1(75.463,48.971) 84.506,48.971 v1(84.531,48.946)
  Bottom Layer w0.4: v1@75.463,48.819 75.921,48.819 75.463,49.276 v1(75.463,48.971)
  Bottom Layer w0.5: v1(72.314,60.833) 73.355,61.874 77.292,61.874 78.245,60.922 U4.26
  Bottom Layer w0.8: v1(71.907,49.428) 72.365,48.971 v1(75.463,48.971) ; v1(84.531,48.946) 90.385,43.092 J1.3
rx_m328: D8.1 IC1.1 Program.1 U3.2 U4.30 | length 119.1
  Top Layer w0.4: 41.91,43.612 49.953,51.655 IC1.1 54.466,51.655 55.829,50.292 60.833,50.292 62.89,52.349 62.89,61.341 v1(63.119,61.57)
  Top Layer w0.5: Program.1 41.91,43.612
  Top Layer w0.8: D8.1 41.91,39.627 Program.1 ; v1(63.119,61.57) 63.119,63.5 64.922,65.303 72.822,65.303 75.006,63.119 80.543,63.119 84.557,67.132 103.81,67.132 104.953,68.275 U3.2
  Bottom Layer w0.4: U4.30@81.445,60.02 81.445,61.76
  Bottom Layer w0.5: v1(63.119,61.57) 63.119,62.611 67.183,66.675 79.324,66.675 81.445,64.554 U4.30
sck_m328: Program.8 U4.17 | length 20.9
  Bottom Layer w0.4: Program.8 61.3,41.173 72.426,52.3 U4.17
step_x: J1.13 U4.32 | length 58.4
  Top Layer w0.5: J1.13 62.775,35.622 74.701,47.549 87.3,47.549 88.036,48.285 88.036,54.356 85.573,56.82 85.573,61.722 v1(87.452,63.602) v1@87.884,63.602
  Bottom Layer w0.5: U4.32 83.045,61.379 85.268,63.602 v1(87.452,63.602)
step_y: J1.12 U4.1 | length 51.7
  Top Layer w0.5: v1(70.053,36.424) 70.053,39.319 76.53,45.796 88.697,45.796 90.17,47.269 90.17,58.42 v1(88.062,60.528)
  Bottom Layer w0.5: U4.1 84.545,58.891 86.182,60.528 v1(88.062,60.528)
  Bottom Layer w0.6: J1.12@65.832,32.583 v1@69.672,36.424
  Bottom Layer w0.8: J1.12 J1.12@65.832,32.583 ; v1@69.672,36.424 v1(70.053,36.424)
step_z: J1.11 U4.2 | length 45.1
  Top Layer w0.5: J1.11 68.297,39.315 75.692,46.711 88.087,46.711 89.154,47.777 89.154,55.956 v1(87.122,57.988)
  Bottom Layer w0.5: U4.2 86.234,57.1 v1(87.122,57.988)
touch_cs: lcd_pin1.10 U2.5 | length 54.1
  Top Layer w0.8: lcd_pin1.10 44.45,111.201 49.07,106.581 64.386,106.581 66.654,104.313 U2.5
  Bottom Layer w0.8: 85.729,104.313 U2.5
tx_esp: U2.21 U3.1 | length 25.6
  Bottom Layer w0.8: U3.1 107.493,89.459 109.647,91.613 U2.21
tx_m328: D9.1 IC1.5 Program.2 U2.22 U4.31 | length 129.9
  Top Layer w0.4: Program.2@44.45,40.894 Program.2 ; IC1.5@52.248,54.255 57.759,54.255 58.318,53.696 60.3,53.696 61.595,54.991 v1(61.595,57.302)
  Top Layer w0.5: v1(47.244,45.466) 51.968,45.466 v1(53.035,46.533)
  Top Layer w0.8: D9.1 40.97,34.874 44.45,38.354 Program.2@44.45,40.894
  Bottom Layer w0.5: v1(53.035,46.533) 53.035,52.553 57.785,57.302 v1(61.595,57.302) 61.595,62.738 66.802,67.945 79.807,67.945 80.759,66.992 82.245,65.507 U4.31
  Bottom Layer w0.6: 80.759,66.992 84.29,66.992
  Bottom Layer w0.8: Program.2 44.45,42.672 v1(47.244,45.466) ; 84.29,66.992 95.682,78.384 95.682,82.677 107.158,94.153 U2.22
VCC: Buzzer1.1 C3.1 C4.1@124.689,117.704 C4.2@104.978,44.069 C8.2 C10.1 IC1.4 IC1.20 J1.14 J1.15 L1.2 P1.1 Program.5 R8.1 R9.1 R10.1 R12.1 U2.30 U3.14 U4.4 U4.6 U4.18 U4.20 VR1.4 | length 348.3
  Top Layer w0.4: 39.329,56.855 IC1.20 48.276,56.855 51.526,53.605 IC1.4 56.174,53.605 57.607,52.172 v1(59.233,52.172)
  Top Layer w0.5: v1(36.043,55.905) 38.379,55.905 39.329,56.855
  Top Layer w0.8: R9.1 31.775,43.815 R8.1 ; v1(70.942,53.238) C10.1@71.857,53.238 ; v1(91.796,58.649) 91.516,58.369 v1(91.516,54.305) 91.516,46.38 93.294,44.602 103.022,44.602 ; C3.1@104.521,44.602 103.022,44.602 ; U2.30 112.247,114.478 C8.2 119.99,117.704 124.689,117.704 124.841,117.856 126.771,117.856 128.524,116.103 128.524,101.249 Buzzer1.1 ; VR1.4 115.648,49.071 109.525,55.194 L1.2 104.953,54.28 C3.1 103.022,44.602
  Bottom Layer w0.3: P1.1 P1.1@32.876,55.905
  Bottom Layer w0.4: U4.20 80.227,54.7
  Bottom Layer w0.5: v1(31.826,44.094) 34.011,44.094 36.043,46.126 v1(36.043,55.905) P1.1@32.876,55.905 ; v1(59.233,52.172) 68.072,52.172 69,53.1 v1@71.081,53.1 ; v1(70.942,53.238) v1@71.081,53.1 ; U4.6 91.111,53.9 v1(91.516,54.305) ; v1(91.796,58.649) 90.627,58.649 87.479,55.5 U4.4 81.027,55.5 80.227,54.7 78.627,53.1 U4.18 v1@71.081,53.1
  Bottom Layer w0.8: v1(59.233,52.172) 57.963,50.902 v2(57.963,46.761) 55.956,46.761 52.07,42.875 Program.5 52.07,28.575 54.381,26.264 89.408,26.264 91.542,28.397 J1.15@91.542,30.048 ; J1.15 J1.14 ; U3.14 107.493,56.82 L1.2 125.476,55.194 v1(125.476,46.431) 125.675,46.63 Buzzer1.1
  other v2: 104.953,44.729
vin: D1.1 J1.17 | length 44.7
  Top Layer w0.8: 86.233,28.778 86.233,28.448 87.63,27.051 97.485,27.051 v1(98.273,27.838)
  Bottom Layer w0.8: v1(98.273,27.838) 98.476,27.838 99.695,26.619 123.495,26.619 D1.1
pads on no net: IC1.3 IC1.6 IC1.8 IC1.9 IC1.10 IC1.11 IC1.12 IC1.13 IC1.14 IC1.19 IC1.22 IC1.23 IC1.24 IC1.27 IC1.28 J1.16 J1.18 J1.19 J1.20 J1.21 J1.23 J1.26 J1.27 J2. J2.8 J2.9 J2.SA J2.SB J2.SC M1.S M2.S M4.S M5.S U2.6 U2.12 U2.13 U2.16 U2.17 U2.18 U2.19 U2.20 U2.24 U2.25 U2.26 U2.27 U3.3 U3.4 U3.5 U3.6 U3.8 U3.9 U3.10 U3.11 U3.12 U4.19 U4.22 U4.23 U4.24 U4.25

## Silkscreen, mask and mechanical layers (free items; w line width, h text height)
Top Overlay:
  drawing of 5039 lines, arcs and shapes, not listed

## Text inside footprints (layer, text, board x,y; h text height)
Buzzer1: Top Overlay "+" at 126.175,99.4 h1.52
C1: Top Overlay "+" at 133.444,42.072 h1 r90
C3: Top Overlay "+" at 103.853,45.323 h1 r90
C4: Top Overlay "+" at 123.589,116.494 h1 r90
D1: Top Overlay "1W" at 128.397,33.172 h0.76 r90; Top Overlay "Zener" at 128.397,36.728 h0.5 r180
J1: Top Overlay "25" at 65.405,26.638 h1.5 r180; Top Overlay "14" at 95.651,26.638 h1.5 r180; Top Overlay "13" at 63.9,36.138 h1.5 r180; Top Overlay "1" at 96.157,36.138 h1.5 r180
lcd_pin1: Top Overlay "2" at 57.15,119.456 h1.27 r180; Top Overlay "1" at 56.642,121.996 h1.27 r180; Top Overlay "9" at 42.926,121.996 h1.27 r180; Top Overlay "10" at 42.926,119.456 h1.27 r180
P1: Mechanical 1 "PCB Edge" at 18.049,62.948 h0.25 r270
T1: Top Overlay "1 2" at 146.101,63.318 h2.5 r90